# EAGLE board cc2650_rev2-1 (EAGLE 8.3.2)
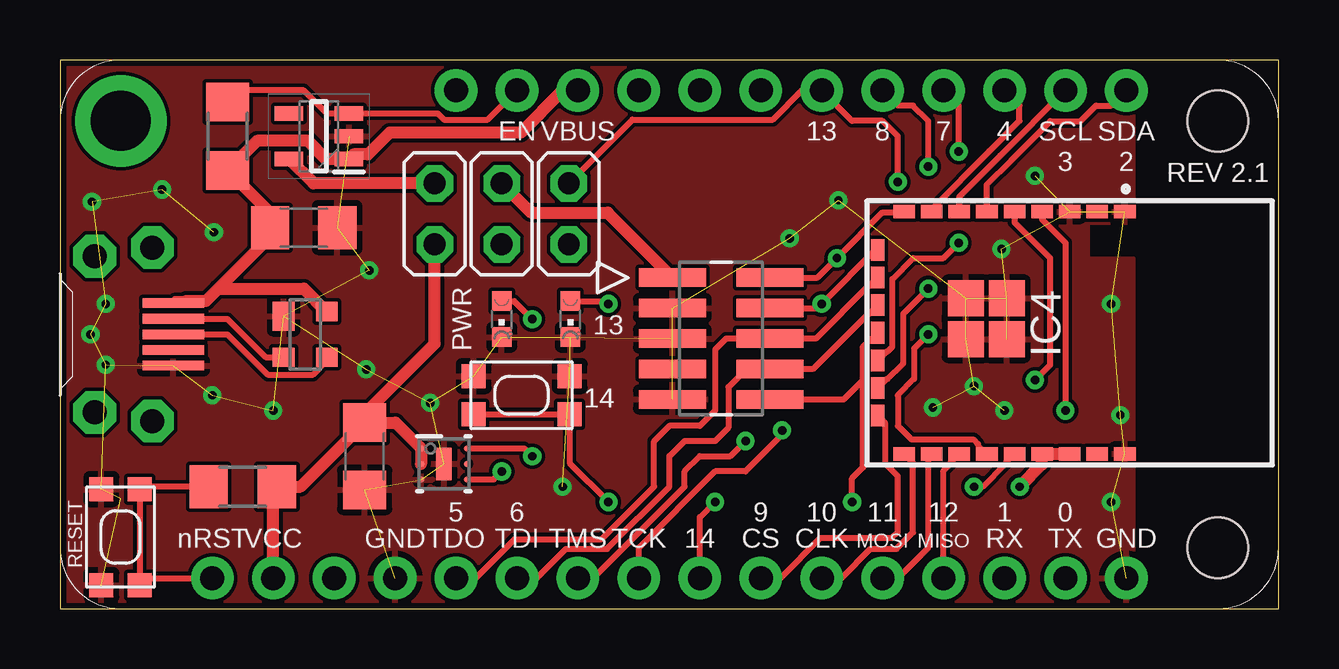
[diagram p0: board, top side]
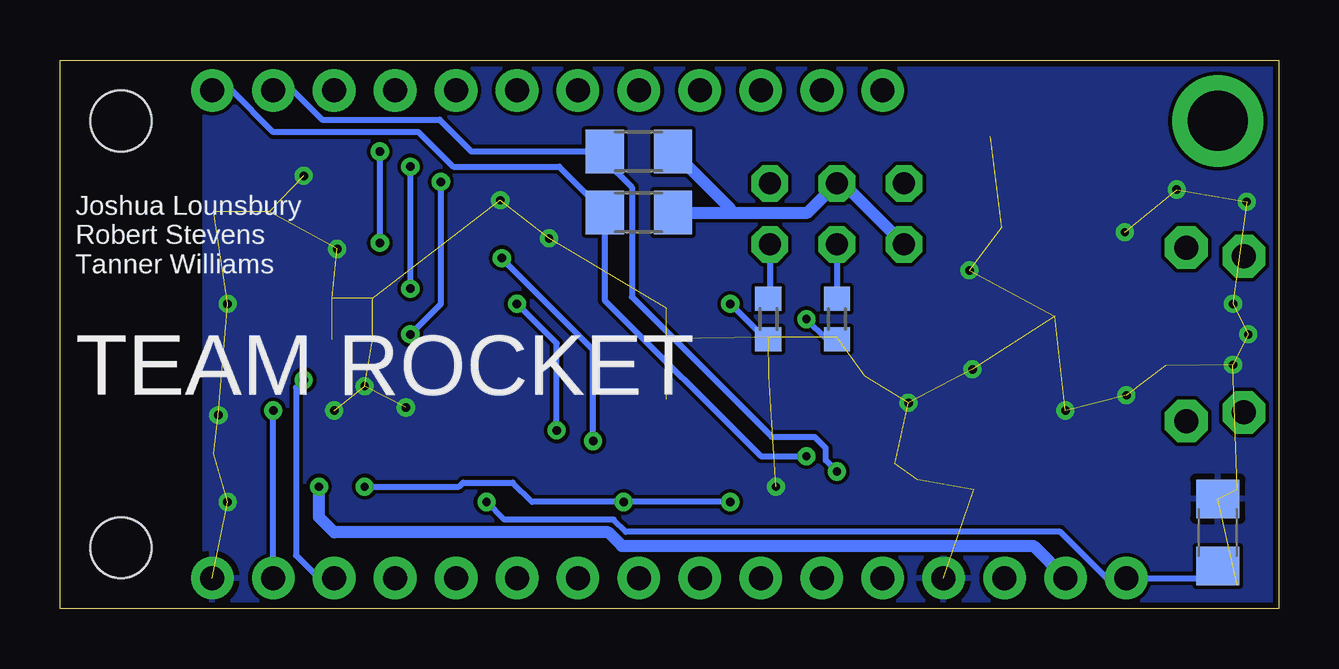
[diagram p1: board, bottom side, seen from below]

Size 50.8 x 22.86 mm. Coordinates in mm from the lower left corner, seen from the top.
Outline: 0,0 50.8,0 50.8,22.86 0,22.86 0,0
Copper layers (1*16): Top 0.035mm / dielectric 1.5mm / Bottom 0.035mm
Design rules "Adafruit Design Rules *": minimum track width 6mil, minimum drill 3mil, track to track 6mil, track to pad 8mil, pad to pad 6mil, via to via 12mil, smd to smd 8mil, copper to edge 10mil, drill to drill 3mil, minimum pad ring 10mil, minimum via ring 8mil, stop-mask expansion 2mil, vias tented up to drill 14mil, thermal gap 10mil
Net classes: 0 Default: width 0.203 mm, drill 0.305 mm, clearance 0.152 mm; 1 Ground: width 0.203 mm, drill 0.305 mm, clearance 0.152 mm to class 0, clearance 0.152 mm; 2 Power: width 0.203 mm, drill 0.305 mm, clearance 0.152 mm to class 0, clearance 0.152 mm to class 1, clearance 0.152 mm

## Footprints (pad centres in the part's own frame; a part is rotated, then mirrored left to right if it is on the bottom)
C1206 = smd 1.6 x 1.8: 1 -1.4,0; 2 1.4,0
SOT95P280X145-5N = smd 1.2 x 0.6: 1 -1.25,0.95; 2 -1.25,0; 3 -1.25,-0.95; 4 1.25,-0.95; 5 1.25,0.95
MOH0029A = smd 0.55 x 0.9: 1 -5.05,-6.15; 2 -5.05,-7.3; 3 -5.05,-8.45; 4 -5.05,-9.6; 5 -5.05,-10.75; 6 -5.05,-11.9; 7 -5.05,-13.05; 8 -5.05,-14.2; 9 -5.05,-15.35; 17 5.05,-15.35; 18 5.05,-14.2; 19 5.05,-13.05; 20 5.05,-11.9; 21 5.05,-10.75; 22 5.05,-9.6; 23 5.05,-8.45; 24 5.05,-7.3; 25 5.05,-6.15 | smd 0.9 x 0.55: 10 -3.45,-16.45; 11 -2.3,-16.45; 12 -1.15,-16.45; 13 0,-16.45; 14 1.15,-16.45; 15 2.3,-16.45; 16 3.45,-16.45 | smd 1.5 x 1.5: 26 -1.435,-11.075; 27 -1.435,-12.775; 28 0.265,-12.775; 29 0.265,-11.075
JP1M = drill 0.914 pad 1.524 octagon: 1 0,-1.27; 2 0,1.27
SAMTEC_FTSH-105-01-L-DV = smd 0.762 x 2.794: 1 -2.54,-2.032; 2 -2.54,2.032; 3 -1.27,-2.032; 4 -1.27,2.032; 5 0,-2.032; 6 0,2.032; 7 1.27,-2.032; 8 1.27,2.032; 9 2.54,-2.032; 10 2.54,2.032
CHIPLED_0603 = smd 0.8 x 0.8: A 0,-0.75; C 0,0.75
FEATHERWING_DIM = drill 1 pad 1.778: 1 6.35,1.27; 2 8.89,1.27; 3 11.43,1.27; 4 13.97,1.27; 5 16.51,1.27; 6 19.05,1.27; 7 21.59,1.27; 8 24.13,1.27; 9 26.67,1.27; 10 29.21,1.27; 11 31.75,1.27; 12 34.29,1.27; 13 36.83,1.27; 14 39.37,1.27; 15 41.91,1.27; 16 44.45,1.27; 17 44.45,21.59; 18 41.91,21.59; 19 39.37,21.59; 20 36.83,21.59; 21 34.29,21.59; 22 31.75,21.59; 23 29.21,21.59; 24 26.67,21.59; 25 24.13,21.59; 26 21.59,21.59; 27 19.05,21.59; 28 16.51,21.59 | drill 2.5 pad 3.81: P$1 2.54,20.32 | hole 2.54: 48.26,20.32; 48.26,2.54
R1206 = smd 1.6 x 1.803: 1 -1.422,0; 2 1.422,0
R0603 = smd 1 x 1.1: 1 -0.85,0; 2 0.85,0
KMR2 = smd 1 x 1: 1 2,0.8; 2 2,-0.8; 3 -2,0.8; 4 -2,-0.8
DNP0006A = smd 0.25 x 0.25: 1 -0.95,0.65; 2 -0.95,0; 3 -0.95,-0.655; 4 0.95,-0.65; 5 0.95,0; 6 0.95,0.65 | smd 0.65 x 1.35: 7 0,0
SOT-143 = smd 1.2 x 0.9: 1 -0.75,-0.9 | smd 0.8 x 0.9: 2 0.95,-0.9; 3 0.95,0.9; 4 -0.95,0.9
2040002 = smd 0.4 x 2.55: 1 -1.3,4.725; 2 -0.65,4.725; 3 0,4.725; 4 0.65,4.725; 5 1.3,4.725 | drill 1 pad 1.778 octagon: P$1 3.255,1.45; P$2 -3.255,1.45; P$4 -3.615,3.85; P$5 3.615,3.85

## Placement (x,y rotation side)
C2  100n  [C1206]  10.16,15.88 0 top
C3  100n  [C1206]  12.7,6.35 270 top
C4  1n  [C1206]  2.54,3.17 90 bottom
IC1  TPS73133DBVR  [SOT95P280X145-5N]  10.79,19.68 180 top
IC4  CC2650MODAMOHR  [MOH0029A]  50.53,11.49 270 top
JP1  PWR_LED  [JP1M]  18.41,16.45 180 top
JP2  GPIO_LED  [JP1M]  21.21,16.45 180 top
JP3  PWR_LED  [JP1M]  15.62,16.45 180 top
JTAG_CONNECTOR  FTSH-105-01-F-DV-K  [SAMTEC_FTSH-105-01-L-DV]  27.56,11.26 270 top
LED0  RED  [CHIPLED_0603]  18.41,12.06 180 top
LED1  GREEN  [CHIPLED_0603]  21.27,12.06 180 top
MS1  FEATHERWING_NODIM  [FEATHERWING_DIM]  0,0 0 top
R2  100k  [R1206]  6.99,19.68 90 top
R3  715  [R0603]  21.27,12.06 90 bottom
R5  787  [R0603]  18.41,12.06 90 bottom
R8  47k  [R1206]  7.62,5.08 0 top
R9  10k  [R1206]  26.67,19.05 0 bottom
R10  10k  [R1206]  26.67,16.51 0 bottom
SW1  SPST_TACT-KMR2  [KMR2]  2.52,2.98 90 top
SW3  SPST_TACT-KMR2  [KMR2]  19.24,8.89 0 top
U1  Value  [DNP0006A]  16,6.03 0 top
U$1  TPD2E001  [SOT-143]  10.22,11.43 270 top
U$2  2040002  [2040002]  0,11.43 270 top

## Library data of the parts
C2-C4 LED0 LED1 R2 R8-R10 = adafruit
IC1 = TPS73133DBVR; DESCRIPTION: Texas Instruments TPS73133DBVR, LDO Voltage Regulator, 0.15A, 3.3 V 0.5%, 1.7 5.5 Vin, 5-Pin SOT-23; HEIGHT: 1.45mm; MANUFACTURER_NAME: Texas Instruments; MANUFACTURER_PART_NUMBER: TPS73133DBVR; MPN: TPS73133DBVR; OC_NEWARK: 86W6350; RS_PART_NUMBER: 6613970; SUPPLIER_NAME: RS
IC4 = CC2650MODAMOHR(2); DESCRIPTION: SimpleLink Bluetooth low energy Wireless MCU Module; HEIGHT: mm; MANUFACTURER_NAME: Texas Instruments; MANUFACTURER_PART_NUMBER: CC2650MODAMOHR; MPN: CC2650MODAMOHR; OC_NEWARK: 02AC9626; SUPPLIER_NAME: RS
JP1-JP3 = jumper; MPN: 2211S-02G; OC_NEWARK: 08N6744
JTAG_CONNECTOR = FTSH-105-01-F-DV-K; DESCRIPTION: .050 x .050 CL DOUBLE VERTICAL SMT TERMINAL STRIP; HEIGHT: mm; MANUFACTURER_NAME: SAMTEC; MANUFACTURER_PART_NUMBER: FTSH-105-01-F-DV-K; MPN: FTSH-105-01-F-DV-K; OC_NEWARK: 45P5160; SUPPLIER_NAME: RS
MS1 = wing_modified
R3 R5 = adafruit; MPN: RC0603JR-07100KL; OC_NEWARK: 68R0147
SW1 SW3 = adafruit; MPN: KMR241G LFS; OC_NEWARK: 58M7854
U1 = OPT3001; APPLICATION_BUILDNUMBER: *; COMPTYPE: IC; MANUFACTURER: Texas Instruments; MOUNTTYPE: SMT; PACKAGEREFERENCE: DNP0006A; PARTNUMBER: OPT3001DNP; PIN_COUNT: 7; REFDES: RefDes; ROHS: Y; TYPE: TYPE
U$1 U$2 = AMP_Ruler-LT1370

## Nets
D+: U$1.3 U$2.3
D-: U$1.2 U$2.2
DIO0_TX: IC4.4 MS1.15
DIO1_RX: IC4.5 MS1.14
DIO2: IC4.6 MS1.17 R10.1 U1.6
DIO3: IC4.7 MS1.18 R9.1 U1.4
DIO4: IC4.8 MS1.19
DIO5_TDO: IC4.11 JTAG_CONNECTOR.6 MS1.5
DIO6_TDI: IC4.12 JTAG_CONNECTOR.8 MS1.6
DIO7: IC4.14 MS1.20
DIO8: IC4.15 MS1.21
DIO9_CS: IC4.16 MS1.10
DIO10_CLK: IC4.17 MS1.11
DIO11_MOSI: IC4.18 MS1.12
DIO12_MISO: IC4.19 MS1.13
DIO13: IC4.20 JP2.1 MS1.22
DIO14: IC4.21 MS1.9 SW3.2 SW3.4
EN: IC1.3 MS1.27 R2.2
GND: C2.2 C3.2 C4.2 IC1.2 IC4.1 IC4.3 IC4.25 IC4.26 IC4.27 IC4.28 IC4.29 JTAG_CONNECTOR.3 JTAG_CONNECTOR.5 JTAG_CONNECTOR.9 LED0.C LED1.C MS1.4 MS1.16 SW1.1 SW1.3 SW3.1 SW3.3 U1.3 U1.7 U$1.1 U$2.5
GPIO_LED: LED1.A R3.1
GPIO_LED_JPR: JP2.2 R3.2
JTAG_TCK: IC4.10 JTAG_CONNECTOR.4 MS1.8
JTAG_TMS: IC4.9 JTAG_CONNECTOR.2 MS1.7
NRESET: C4.1 IC4.13 JTAG_CONNECTOR.10 MS1.1 R8.1 SW1.2 SW1.4
PWR_LED: LED0.A R5.1
PWR_LED_JPR: JP1.2 R5.2
VBUS [Power]: C2.1 IC1.1 MS1.26 R2.1 U$1.4 U$2.1
VCC: C3.1 IC4.22 IC4.23 JP1.1 JP3.2 JTAG_CONNECTOR.1 MS1.2 R8.2 R9.2 R10.2 U1.1 U1.2
VCC_JPR: IC1.5 JP3.1

## Tracks (layer width: path | path; a pad name or v marks a point on that pad's centre or on a via)
D+
  Top 0.254: U$2.3 6.97,11.43 8.65,9.75 10.54,9.75 11.12,10.33 U$1.3
D-
  Top 0.254: U$2.2 4.74,12.06 6.99,12.06 8.57,10.48 U$1.2
DIO0_TX  (via drill 0.35)
  Top 0.254: IC4.4 40.93,16.22 41.91,15.24 v41.91,8.26
  Bottom 0.254: MS1.15 v41.91,8.26
DIO1_RX  (via drill 0.35)
  Top 0.254: IC4.5 39.78,16.1 41.27,14.61 41.27,10.16 v40.64,9.53
  Bottom 0.254: MS1.14 40.01,1.27 40.96,2.22 40.96,9.21 v40.64,9.53
DIO2  (via drill 0.35)
  Top 0.254: IC4.6 38.63,17.66 39.65,18.67 39.65,18.68 41.28,20.31 42.54,20.31 43.18,20.95 43.81,20.95 MS1.17 | U1.6 19.35,6.68 v19.68,6.35
  Bottom 0.254: MS1.17 43.63,21.59 41.9,19.86 35.86,19.86 34.41,18.41 30,18.41 R10.1 28.09,12.85 21.59,6.35 v19.68,6.35
DIO3  (via drill 0.35)
  Top 0.254: IC4.7 37.48,17.15 39.19,18.86 39.19,18.87 MS1.18 | U1.4 18.08,5.38 v18.41,5.71
  Bottom 0.254: MS1.18 41.09,21.59 39.88,20.37 34.98,20.37 33.66,19.05 R9.1 28.09,18.68 26.96,17.55 26.96,12.99 21.13,7.16 19.35,7.16 18.88,6.69 18.88,6.17 v18.41,5.71
DIO4
  Top 0.254: IC4.8 36.33,16.65 38.73,19.05 38.73,19.06 40,20.33 40,20.96 MS1.19
DIO5_TDO
  Top 0.254: MS1.5 17.33,1.27 18.95,2.9 22.58,2.9 24.77,5.08 24.77,6.99 25.4,7.62 26.67,7.62 27.05,8 27.06,8 27.3,8.25 27.3,10.79 27.77,11.26 JTAG_CONNECTOR.6 31.5,11.26 33.67,13.42 33.71,13.42 IC4.11
DIO6_TDI
  Top 0.254: 33.97,12.53 IC4.12 33.71,12.27 33.67,12.27 31.38,9.98 JTAG_CONNECTOR.8 28.62,9.98 27.86,9.23 27.86,7.54 27.3,6.99 26.04,6.99 25.4,6.35 25.4,5.08 22.81,2.49 21.09,2.49 19.87,1.27 MS1.6
DIO7  (via drill 0.35)
  Top 0.254: IC4.14 34.45,10.71 34.5,10.71 34.69,10.91 34.69,13.73 35.56,14.61 36.83,14.61 v37.47,15.24 | v37.47,19.05 37.47,20.95 MS1.20
  Bottom 0.254: v37.47,15.24 v37.47,19.05
DIO8  (via drill 0.35)
  Top 0.254: v36.2,13.34 35.15,12.29 35.15,10.21 34.5,9.56 34.45,9.56 IC4.15 | v36.2,18.41 36.2,20.32 35.56,20.95 34.92,20.95 MS1.21
  Bottom 0.254: v36.2,13.34 v36.2,18.41
DIO9_CS
  Top 0.254: MS1.10 30.03,1.27 31.7,2.95 34.69,2.95 34.92,3.18 34.92,5.52 34.4,6.03 34.4,7.72 IC4.16
DIO10_CLK
  Top 0.254: MS1.11 32.57,1.27 33.78,2.49 34.87,2.49 35.56,3.17 35.56,6.03 35.55,6.03 35.55,6.07 IC4.17
DIO11_MOSI
  Top 0.254: MS1.12 34.92,1.27 36.2,2.54 36.2,6.3 IC4.18
DIO12_MISO
  Top 0.254: IC4.19 37.11,6.07 37.11,6.03 36.83,5.75 MS1.13
DIO13  (via drill 0.35)
  Top 0.254: IC4.20 38.26,6.81 38.26,6.86 38.07,7.05 35.5,7.05 34.92,7.62 34.92,8.89 35.6,9.57 35.6,10.84 v36.2,11.43 | v34.92,17.78 34.92,19.68 34.29,20.32 33.02,20.32 MS1.22 30.93,21.59 29.71,20.37 23.86,20.37 JP2.1
  Bottom 0.254: v36.2,11.43 34.92,12.7 v34.92,17.78
DIO14  (via drill 0.35)
  Top 0.254: IC4.21 39.41,6.07 39.41,6.03 38.46,5.08 v38.1,5.08 | v27.3,4.45 26.67,3.81 MS1.9 | SW3.4 SW3.2 21.24,6.06 v22.86,4.45
  Bottom 0.254: v38.1,5.08 34.17,5.08 33.99,5.25 31.93,5.25 31.11,4.45 v27.3,4.45 v22.86,4.45
EN
  Top 0.254: MS1.27 17.83,20.37 16,20.37 15.74,20.64 IC1.3 11.12,20.64 10.16,21.59 7.47,21.59 R2.2
GND  (via drill 0.35)  (47 unrouted)
  other vias: 1.91,12.7 1.27,11.43 1.91,10.16 40.64,18.03 43.81,12.7 39.37,8.26 43.81,4.45 6.35,8.89 8.89,8.26 20.95,5.08 15.43,8.57 12.89,14.1 32.45,17.02 4.25,17.46 38.1,9.27 36.39,8.38 44.2,8.06 39.24,14.99 30.42,15.43 12.76,9.97 6.41,15.68 1.33,16.95
  pour Bottom: 0,22.86 44.77,22.86 44.77,0 0,0
  pour Top: 0,22.92 0,0 44.77,0 44.77,14.61 42.86,14.61 42.86,16.07 44.77,16.07 44.77,22.92
GPIO_LED  (via drill 0.35)
  Top 0.254: LED1.A 22.75,12.81 v22.86,12.7
  Bottom 0.254: R3.1 21.38,11.21 v22.86,12.7
GPIO_LED_JPR
  Bottom 0.254: JP2.2 21.21,12.98 R3.2
JTAG_TCK  (via drill 0.35)
  Top 0.254: 34.04,14.99 IC4.10 | 34.04,14.99 33.96,15.06 | MS1.8 24.13,2.54 27.3,5.71 28.57,5.71 30.1,7.24 v30.1,7.43 | JTAG_CONNECTOR.4 31.57,12.53 v31.75,12.7 34.04,14.99
  Bottom 0.254: v30.1,7.43 30.1,11.05 v31.75,12.7
JTAG_TMS  (via drill 0.35)
  Top 0.254: MS1.7 22.23,1.27 26.04,5.08 26.04,5.71 26.67,6.35 27.94,6.35 v28.57,6.99 | JTAG_CONNECTOR.2 31.57,13.79 v32.38,14.61 34.29,16.51 35.15,16.51 IC4.9
  Bottom 0.254: v32.38,14.61 28.57,10.79 v28.57,6.99
NRESET  (via drill 0.35)
  Top 0.254: MS1.1 3.61,1.27 SW1.4 SW1.2 3.42,5.08 R8.1 | IC4.13 33.71,11.12 33.67,11.12 33.48,10.93 33.48,9.53 | 33.48,9.53 33.48,5.89 33.02,5.43 v33.02,4.45 | JTAG_CONNECTOR.10 32.67,8.71 33.48,9.53
  Bottom 0.254: C4.1 3.04,1.27 MS1.1 7.17,1.27 9.1,3.2 27.21,3.2 27.72,3.71 32.28,3.71 v33.02,4.45
PWR_LED  (via drill 0.35)
  Top 0.254: LED0.A 18.93,12.81 v19.68,12.06
  Bottom 0.254: R5.1 18.84,11.21 v19.68,12.06
PWR_LED_JPR
  Bottom 0.254: JP1.2 R5.2
VBUS
  Top 0.406: U$2.1 4.82,12.83 5.27,12.83
  Top 0.508: 6.6,13.34 10.17,13.34 U$1.4 | 6.6,13.34 6.09,12.83 5.27,12.83 | 8.74,15.88 C2.1 | MS1.26 20.95,21.59 19.2,19.84 13.74,19.84 12.83,18.93 12.24,18.93 IC1.1 11.09,18.73 10.33,19.49 8.21,19.49 R2.1 8.76,16.49 C2.1 | C2.1 8.76,15.49 6.6,13.34
VCC  (via drill 0.35)
  Top 0.508: IC4.23 IC4.22 40.93,6.01 v40.01,5.08 | JP1.1 19.56,16.57 arc45 19.74,16.5 22.82,16.5 JTAG_CONNECTOR.1 | JP3.2 15.62,11.05 12.7,8.12 C3.1 | MS1.2 8.89,4.93 R8.2 10.03,5.08 C3.1 | U1.2 U1.1 13.98,7.75 C3.1
  Bottom 0.508: MS1.2 10.24,2.62 27.38,2.62 27.94,3.17 39.37,3.17 40.01,3.81 v40.01,5.08 | JP3.2 18.09,17.64 arc-45 18.27,17.72 JP1.1 19.63,16.5 22.86,16.5 | 22.86,16.5 25.23,16.5 R10.2 | 22.86,16.5 22.86,16.66 R9.2
VCC_JPR
  Top 0.508: JP3.1 10.56,17.72 IC1.5

## Text on the board
tNames: EN | VBUS | 13 | 8 | 7 | 4 | SCL | SDA | 3 | 2 | REV 2.1 | PWR | 13 | 14 | 5 | 6 | 9 | 10 | 11 | 12 | 1 | 0 | RESET | nRST | VCC | GND | TDO | TDI | TMS | TCK | 14 | CS | CLK | MOSI | MISO | RX | TX | GND
bNames: Joshua Lounsbury / Robert Stevens / Tanner Williams | TEAM ROCKET